# Altium PCB PCB_REMOTE CONTROL IR.PcbDoc
Units mil, origin at the board's own origin, x right, y up, seen from the top; angles counter-clockwise.
Board outline 2731.03 x 5071.03 mil, 2 copper layers (Top Layer, Bottom Layer); 48 components, 41 nets, 195 pads, 22 vias.
Unrouted connection lines stored in the file: 8.
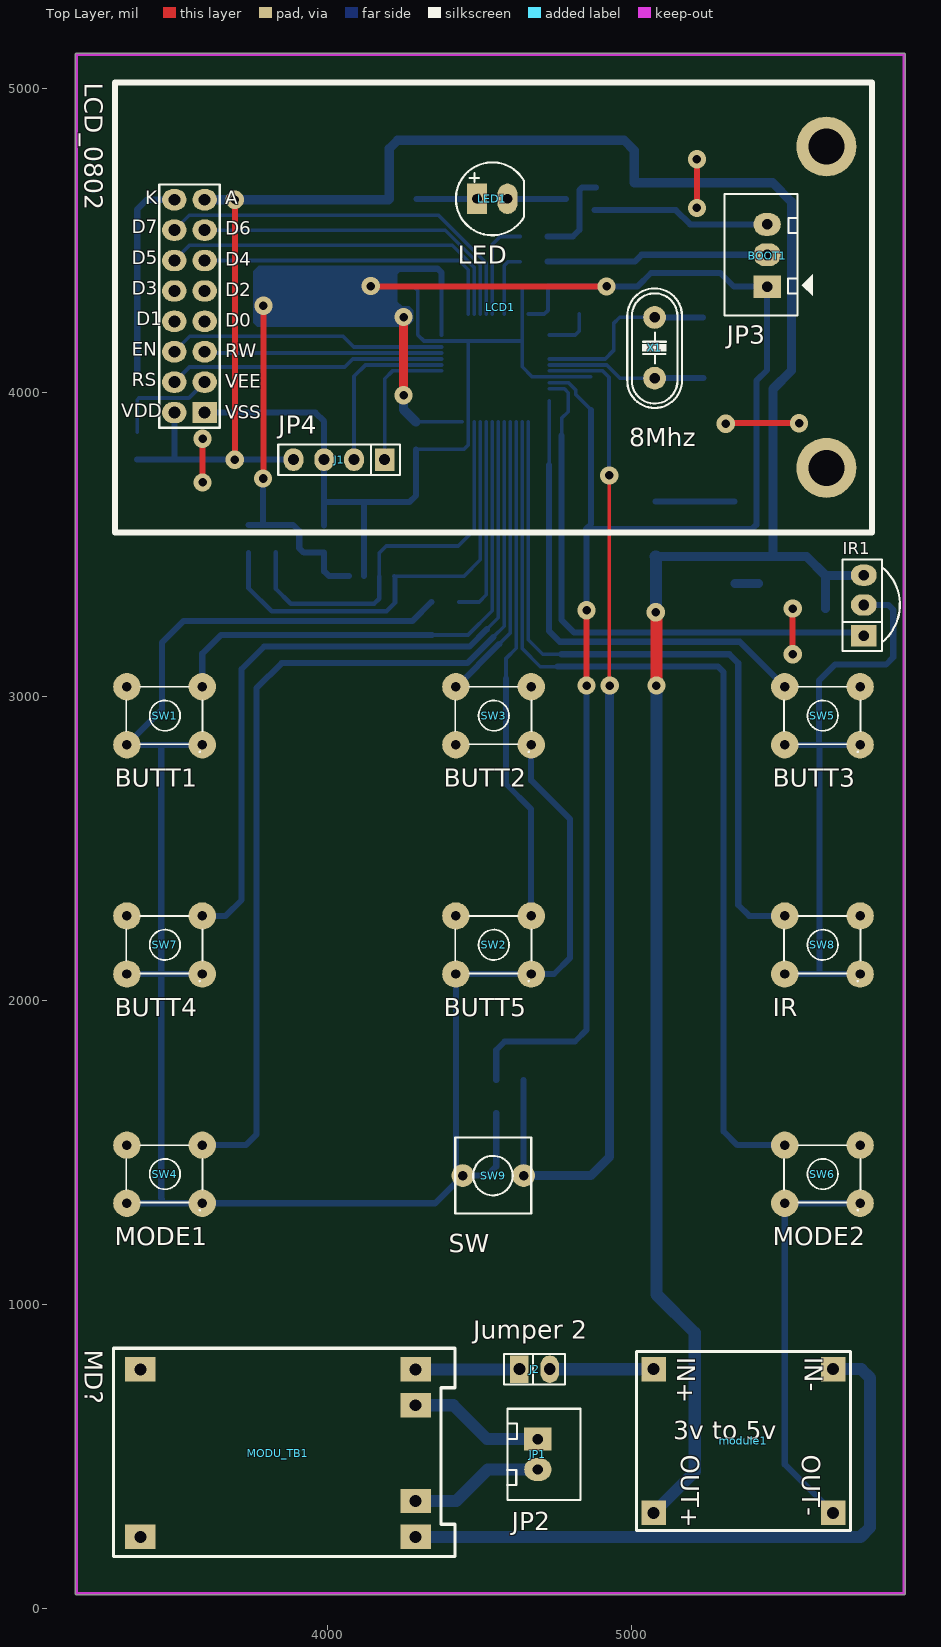
[diagram p0: Top Layer view]
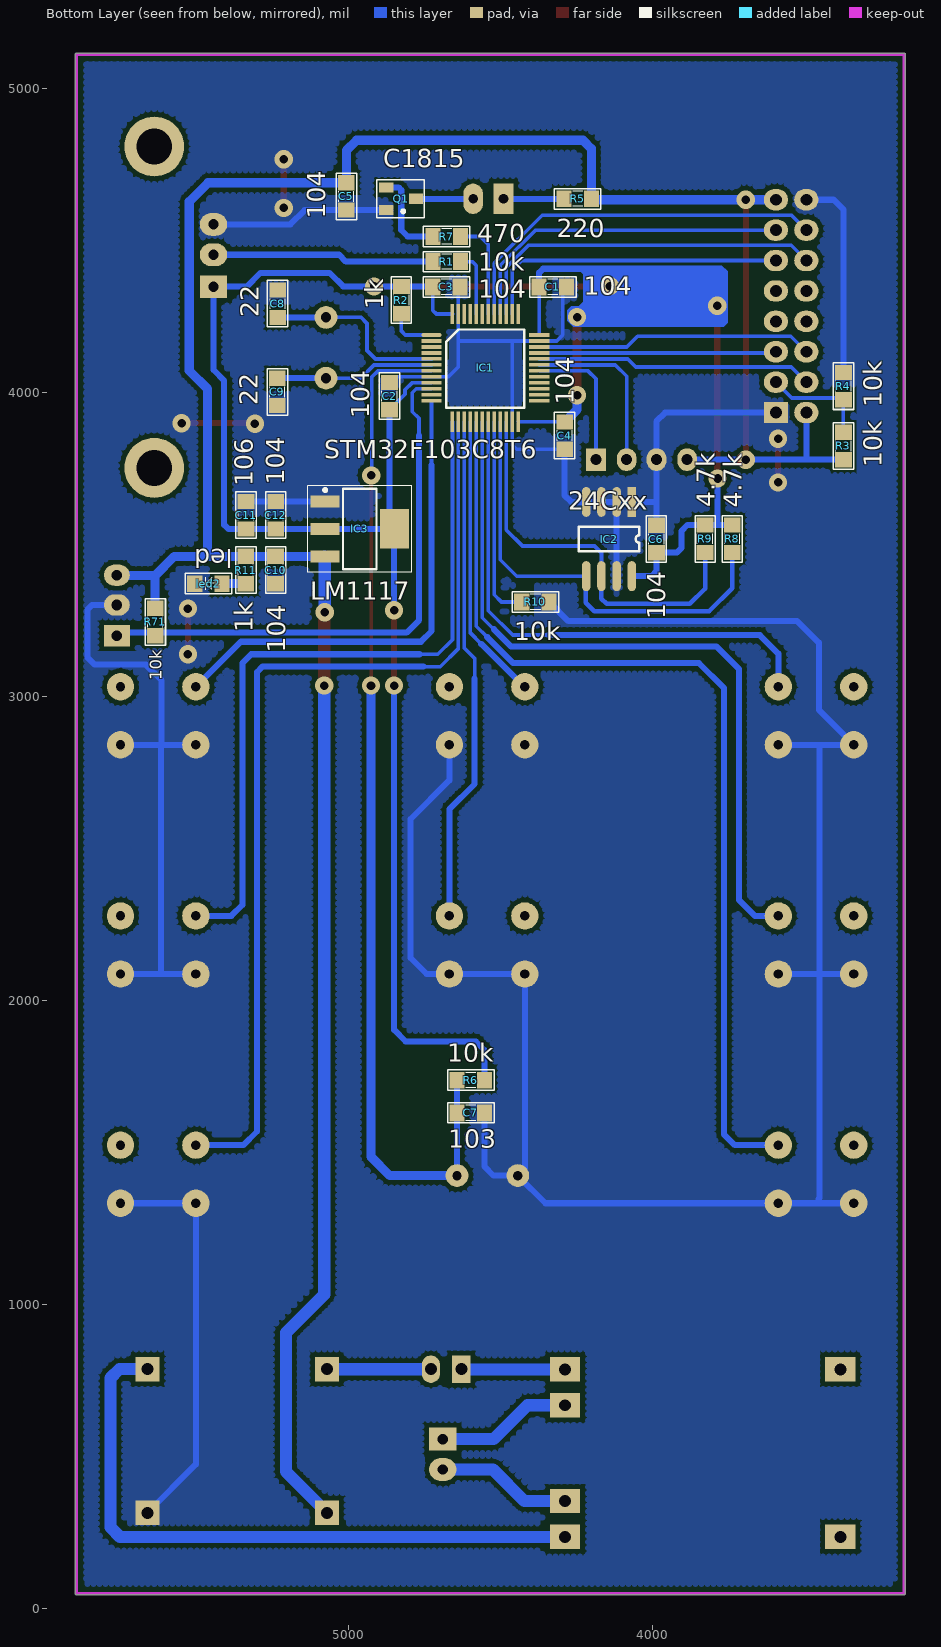
[diagram p1: Bottom Layer view, seen from below]
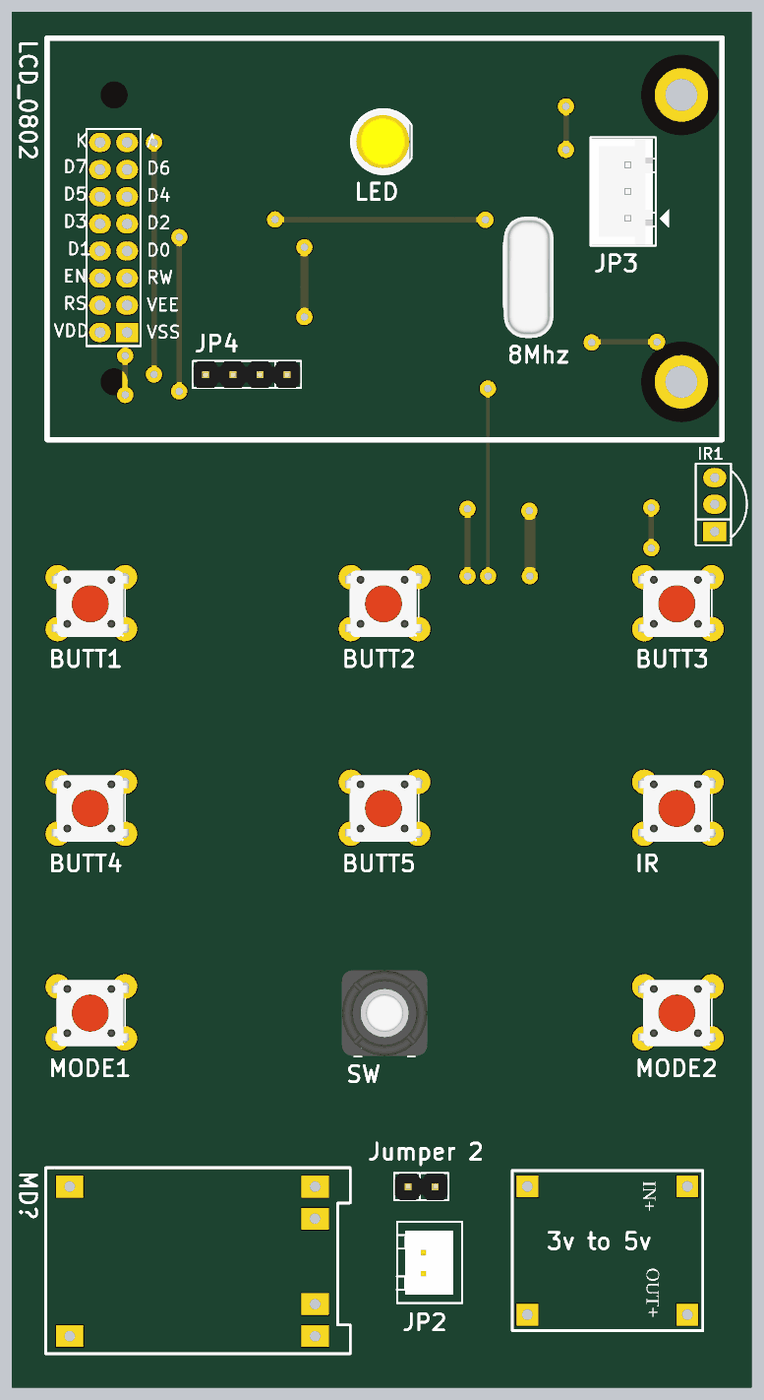
[diagram p2: 3D render of the assembled board from above, using the file's embedded part models]
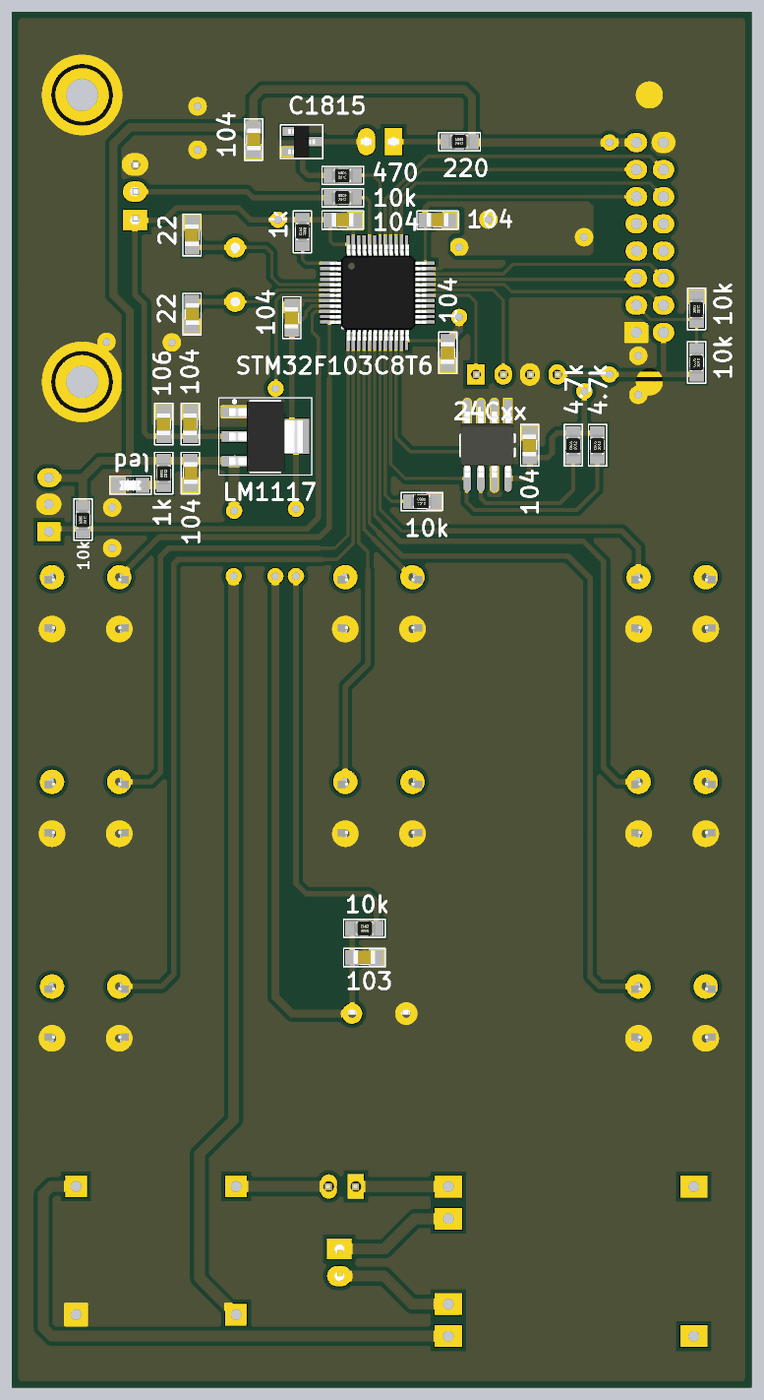
[diagram p3: 3D render of the assembled board from below, using the file's embedded part models]

## Layer stack, top to bottom
Top Layer: signal copper 1.4
Dielectric: dielectric 12.6, FR-4, Dk 4.8
Bottom Layer: signal copper 1.4

## Board outline
3168.99,51 3168.99,5110 cw(c3174,5110) 3169.09,5111 cw(c3174,5112) 3174,5117.02 5895,5117.02 cw(c5895,5112) 5900.02,5112 5900.02,51 cw(c5895,51) 5895,45.98 3174,45.98 cw(c3174,51)

## Design rules (kind name [scope] priority, off if disabled: settings)
Clearance POLY [Inpolygon] p1: gap=15
Clearance Width_IC1 [(ObjectKind = 'Track') And (Width = AsMils(11.99))] p2: gap=7
Clearance pad_IC1 [(ObjectKind = 'Pad') And (Component = 'IC1')] p3: gap=7
Clearance [All] p4: gap=10
ComponentClearance [All] p1: gap=0 collisioncheckmode=3 verticalgap=0 showdistances=FALSE
Height [All] p1: minheight=0 maxheight=10000 prefheight=500
PlaneConnect [All] p1: planeconnectstyle=Direct reliefexpansion=20 reliefentries=4 reliefconductorwidth=10 reliefairgap=10
PolygonConnect [All] p1: connectstyle=Direct reliefconductorwidth=10 reliefentries=4 polygonreliefangle="90 Angle"
RoutingVias [All] p1: holewidth=28 width=50 viastyle="Through Hole" minholewidth=28 minwidth=50 maxholewidth=28 maxwidth=500
SilkscreenOverComponentPads [All] p1: minsilkscreentomaskgap=10
SolderMaskExpansion [All] p1: expansion=4
Width [All] p1: maxlimit=100 minlimit=10 preferedwidth=10
24 further rules are at their usual default settings.

## Components (designator, comment, footprint, x,y, rotation, side; value= is the part's Value field where it differs from the comment)
BOOT1 "JP3" CON3 5445,4354 r90 top
C1 "104" SM-0805 4329,4348 r0 bottom
C2 "104" SM-0805 4866,3989 r270 bottom
C3 "104" SM-0805 4679,4348 r0 bottom
C4 "104" SM-0805 4290,3859 r270 bottom
C5 "104" SM-0805 5008,4646 r90 bottom
C6 "104" SM-0805 3988,3519 r270 bottom
C7 "103" SM-0805 4599,1631 r0 bottom
C8 "22" SM-0805 5234,4293 r270 bottom
C9 "22" SM-0805 5235,4003 r90 bottom
C10 "104" SM-0805 5241,3417 r90 bottom
C11 "106" SM-0805 5338,3597 r270 bottom
C12 "104" SM-0805 5240,3597 r270 bottom
IC1 "STM32F103C8T6" STM32F103C8T6 4781,4143 r180 bottom
IC2 "24Cxx" SOP8 4069,3641 r270 bottom
IC3 "LM1117" SOT223-4N 4964,3552 r180 bottom
IR1 "IR" IR 5763,3301 r90 top
J1 "JP4" jp4 4087,3780 r180 top
J2 "Jumper 2" JP2 4630,788 r0 top
JP1 "JP2" CON2 4691,558 r270 top
LCD1 "LCD_0802" LCD0802 3595,3930 r0 top
LED1 "LED" led5mm_yellow 4491,4638 r0 top
led2 "led" 0805 5461,3373 r0 bottom
MODU_TB1 "MD?" MODU_Tb4056 3836,512 r0 top
module1 "3v to 5v" "3v to 5v" 5367,552 r270 top
Q1 "C1815" SOT23B 4828,4638 r270 bottom
R1 "10k" RES_0805 4676,4427.5 r180 bottom
R2 "1k" RES_0805 4831,4303 r270 bottom
R3 "10k" RES_0805 3369,3827 r90 bottom
R4 "10k" RES_0805 3369,4024 r90 bottom
R5 "220" RES_0805 4245,4634 r180 bottom
R6 "10k" RES_0805 4601,1743 r0 bottom
R7 "470" RES_0805 4676,4510 r180 bottom
R8 "4.7k" RES_0805 3735,3522 r90 bottom
R9 "4.7k" RES_0805 3824,3522 r90 bottom
R10 "10k" RES_0805 4384,3308 r180 bottom
R11 "1k" RES_0805 5335,3419 r90 bottom
R71 "10k" RES_0805 5633,3248 r90 bottom
SW1 "BUTT1" SW4 3463,2937 r0 top
SW2 "BUTT5" SW4 4545,2183 r0 top
SW3 "BUTT2" SW4 4545,2937 r0 top
SW4 "MODE1" SW4 3463,1429 r0 top
SW5 "BUTT3" SW4 5627,2937 r0 top
SW6 "MODE2" SW4 5627,1429 r0 top
SW7 "BUTT4" SW4 3463,2183 r0 top
SW8 "IR" SW4 5627,2183 r0 top
SW9 "SW" SW2 4443.99,1425 r0 top
X1 "8Mhz" XT2 5075,4148 r90 top

## Footprints (in the part's own frame and the unit in brackets; to place one, negate y for a bottom-side part, rotate by r counter-clockwise, add the part's x,y. Pads: shape width x height; smd on the part's side, far side on the other; paste and mask are expansions set on the pad)
"3v to 5v" [mm]
  rect 2.032x2.032 hole 1: 1(-6,7.5) 2(-6,-7.5) 3(6,-7.5) 4(6,7.5)
  silkscreen extent -7.49,-8.92 7.49,8.94
0805 [mil]
  rect 50x55 smd: 1(-44,1) 2(46,1)
  silkscreen extent -76,-33 77,34, body extent -39,-16 42,20, height 33
CON2 [mil] "CON2"
  rect 75x90 hole 34: 1(0,0)
  oval 75x90 hole 34: 2(100,0)
  silkscreen extent -100,-101 200,140, body extent -68,-70 168,107, height 236
CON3 [mil] "CON 3"
  rect 75x90 hole 34: 1(-5,0)
  oval 75x90 hole 34: 2(100,0) 3(200,0)
  silkscreen extent -100,-150 300,140, body extent -95,-90 295,136, height 276
IR [mil] "Receiver Infared IC"
  rect 70x85 hole 35: 1(-100,0)
  oval 70x85 hole 35: 2(1,0) 3(99,0)
  silkscreen extent -150,-119 150,70
JP2 [mil]
  rect 60x90 hole 39.37: 1(0,0)
  oval 60x90 hole 39.37: 2(100,0)
  silkscreen extent -50,-50 150,50, body extent -48,-50 148,48, height 323
jp4 [mil] "Jumper 4"
  rect 65x75 hole 36: 1(-100,0)
  oval 65x75 hole 36: 2(1,0) 3(99,0) 4(200,0)
  silkscreen extent -150,-50 250,50, body extent -148,-48 248,50, height 323
LCD0802 [mil]
  rect 80x70 hole 39.37: 1(0,5)
  oval 80x70 hole 39.37: 2(-100,5) 3(0,105) 4(-100,105) 5(0,205) 6(-100,205) 7(0,305) 8(-100,305) 9(0,405) 10(-100,405) 11(0,505) 12(-100,505) 13(0,605) 14(-100,605) 15(0,705) 16(-100,705)
  round 0 all layers, no hole mask+50: ""(-47.91,-177.09) ""(-47.91,880)
  round 196.85 hole 118.11 mask+50: ""(2045,-177.09) ""(2045,880)
  silkscreen extent -295,-390 2195,1090
led5mm_yellow [mil]
  rect 65x100 hole 32: 1(0,0)
  oval 65x100 hole 32: 2(100,0)
  silkscreen extent -70,-120 154,120, body extent -67,-118 146,119, height 347
MODU_Tb4056 [mm]
  rect 2.54x2.032 hole 1: 1(-11.5,7) 2(-11.5,-7) 3(11.5,-7) 4(11.5,-4) 5(11.5,4) 6(11.5,7)
  silkscreen extent -13.74,-8.64 14.78,8.76
RES_0805 [mil]
  rect 50x55 smd: 1(-47,4) 2(43,4)
  silkscreen extent -79,-30 74,37, body extent -43,-21 35,29, height 18
SM-0805 [mil] "Compoment SMD 80x50mil"
  rect 50x55 smd: 1(-45,0) 2(45,0)
  silkscreen extent -77,-34 76,33, body extent -40,-27 40,23, height 24
SOP8 [mm]
  rect 2.5x0.7 smd: 1(0,0)
  oval 2.5x0.7 smd: 2(0,-1.27) 3(0,-2.54) 4(0,-3.81) 5(6.2,-3.81) 6(6.2,-2.54) 7(6.2,-1.27) 8(6.2,0)
  silkscreen extent 2.08,-4.45 4.12,0.63, body extent -0.08,-4.44 6.12,0.56, height 1.74
SOT23B [mm] "SOT 23B"
  rect 0.85x1.2 smd: 1(0.94,-1.245) 2(0,1.25) 3(-0.95,-1.25)
  silkscreen extent -1.57,-2.03 1.57,1.93, body extent -1.5,-1.3 1.5,1.2, height 1.06
SOT223-4N [mm] "SOT223, 4-Leads, Body 6.5x3.5mm, Pitch 2.3mm, Lead Span 7mm, IPC Medium Density"
  rect 2.4x1 smd: 1(-2.9,2.3) 2(-2.9,0) 3(-2.9,-2.3)
  rect 2.4x3.3 smd: 4(2.9,0)
  silkscreen extent -4.35,-3.6 4.35,3.6, body extent -3.39,-3.27 3.5,3.23, height 1.72
STM32F103C8T6 [mm]
  oval 1.7x0.3 smd: 1(1.346,1.194)
  rect 1.7x0.3 smd: 2(1.346,0.694) 3(1.346,0.194) 4(1.346,-0.306) 5(1.346,-0.806) 6(1.346,-1.306) 7(1.346,-1.806) 8(1.346,-2.306) 9(1.346,-2.806) 10(1.346,-3.306) 11(1.346,-3.806) 12(1.346,-4.306) 25(10.346,-4.306) 26(10.346,-3.806) 27(10.346,-3.306) 28(10.346,-2.806) 29(10.346,-2.306) 30(10.346,-1.806) 31(10.346,-1.306) 32(10.346,-0.806) 33(10.346,-0.306) 34(10.346,0.194) 35(10.346,0.694) 36(10.346,1.194)
  rect 0.3x1.7 smd: 13(3.096,-6.056) 14(3.596,-6.056) 15(4.096,-6.056) 16(4.596,-6.056) 17(5.096,-6.056) 18(5.596,-6.056) 19(6.096,-6.056) 20(6.596,-6.056) 21(7.096,-6.056) 22(7.596,-6.056) 23(8.096,-6.056) 24(8.596,-6.056) 37(8.596,2.944) 38(8.096,2.944) 39(7.596,2.944) 40(7.096,2.944) 41(6.596,2.944) 42(6.096,2.944) 43(5.596,2.944) 44(5.096,2.944) 45(4.596,2.944) 46(4.096,2.944) 47(3.596,2.944) 48(3.096,2.944)
  silkscreen extent 2.57,-4.88 9.09,1.65, body extent 1.42,-6.07 10.42,2.93, height 1.5
SW2 [mil] "SW button 2pin, 250x 250 mil"
  round 75 hole 31: 1(0,0) 2(200,0)
  silkscreen extent -25,-125 225,125, body extent -56,-161 258,159, height 157
SW4 [mil] "SW button 4pin, 250 x250 mil"
  round 90 hole 31: 1(-124,-95) 2(124,96) 3(124,-95) 4(-124,96)
  silkscreen extent -126,-119 125,96, body extent -160,-124 152,120, height 276
XT2 [mil] "Footpin for Crystal 2 pin"
  round 75 hole 34: 1(-100,0) 2(100,0)
  silkscreen extent -198,-90 195,90, body extent -233,-93 213,90, height 138

## Part data
BOOT1: library part Con3, "Connector 3"
C1 C2 C3 C4 C5 C6 C7 C8 C9 C10 C11 C12: library part CM, "Cap SMD"
IC2: "Standard 2-Wire Bus Interface Serial EEPROM"
IC3: "3v3"
IR1: "Receiver Infraed IC"
J2: library part "JP 2"
JP1: library part Con2, "Connector 2"
LED1: "LED Single colour Green and Red"
led2: library part led_dan
MODU_TB1: library part TB4056, "Modu_nguon"
module1: library part "3V TO 5V"
Q1: "NPN 600mW, ECB"
R1 R2 R3 R4 R5 R6 R7 R8 R9 R10 R11 R71: library part RES_0805, "res_dan"
SW1 SW2 SW3 SW4 SW5 SW6 SW7 SW8: library part SW4, "Switch button 4 pin"
SW9: library part SW2, "Switch button 2 pin"
X1: library part XT2, "Crystal For all Crystal 2pin."

## Via types
v1: diameter 60, hole 28, Top Layer to Bottom Layer, 22 vias

## Nets (pads, with @x,y where several pads share a name; then routed paths per layer and width w, separated by ;. In a path a pad name is that pad's centre, name@x,y a point inside that pad or via, vN(x,y) a via of type N, cw(c..) or ccw(c..) an arc to the next point about the centre after c; other vN are vias at no path point)
3.3: BOOT1.1 C1.2 C2.2 C3.2 C4.1 C6.2 C11.2 C12.2 IC1.9 IC1.24 IC1.36 IC1.48 IC2.8 IC3.2 IC3.4 R2.1 R6.1 R8.2 R9.2 | length 8443.9
  Top Layer w20: v1(3787,3718) 3788,3719 v1(3788,4286) ; v1(4141,4351) 4142,4350 v1(4917,4350) ; v1(4851,3037) v1(4851,3285)
  Top Layer w30: v1(4249,3992) v1(4249,4249)
  Bottom Layer w11.99: C4.1 4290.57,3904.57 IC1.24 ; IC1.36 4374,4190.33 C1.2 ; IC1.48 4711.9,4258.9 4724,4271 C3.2 ; IC1.9 4792.48,4032.52 4815,4010 4815,3995 C2.2
  Bottom Layer w20: R8.2 3783.5,3565 ; v1(3787,3718) 3787,3568.5 3783.5,3565 ; v1(3788,4286) 3787.5,4286.5 4211.5,4286.5 ; IC2.8 4004.09,3396.91 3988,3413 C6.2 3921,3474 3906,3489 3906,3545 3886,3565 R9.2 3783.5,3565 ; v1(4141,4351) 4203,4351 4206,4348 ; v1(4249,4249) 4211.5,4286.5 ; C1.2 4374,4395 4361,4408 4219,4408 4206,4395 4206,4348 ; R6.1 4554,1838 4582,1866 4813,1866 4851,1904 v1(4851,3037) ; C3.2 4726,4350 R2.1 v1(4917,4350) 5019,4350 5063,4394 5291,4394 5336,4349 BOOT1.1 5445,4075 5410,4040 5410,3566 5396,3552 C11.2 C12.2 IC3.2 IC3.4 ; v1(4851,3285) 4851,3550.83 IC3.4 ; C2.2 4866,3568.17 IC3.4 ; 4206,4348 4206,4292 4211.5,4286.5
  Bottom Layer w30: v1(4249,3992) 4249,3945 C4.1
5V: C5.2 C10.2 IC3.3 IR1.3 J1.4 LCD1.2 LCD1.15 module1.3 R3.1 R5.2 R11.2 R71.2 | length 9044.2
  Top Layer w20: v1(3694,3780) v1@3694,4634
  Top Layer w40: v1(5079,3278) 5081,3276 v1(5081,3037)
  Bottom Layer w20: R3.1 3497,3780 ; LCD1.2 3495,3782 3497,3780 ; J1.4 v1(3694,3780) 3497,3780 ; R11.2@5338.45,3461.45 R11.2
  Bottom Layer w30: LCD1.15 v1(3694,4635) 4199,4635 R5.2 4202,4803 4229.5,4830.5 4974.5,4830.5 5008,4797 C5.2 5463,4691 5525,4629 5525,4073 5464.5,4012.5 5464.5,3462 ; IC3.3 5078.72,3462 C10.2 5337.9,3462 R11.2@5338.45,3461.45 ; R11.2 5464.5,3462 ; R71.2 5637,3399 ; IR1.3 5762,3399 5637,3399 ; 5464.5,3462 5574,3462 5637,3399
  Bottom Layer w40: module1.3 5207,451.06 5207,908 5081,1034 v1(5081,3037) ; IC3.3 5079,3460.62 v1(5079,3278)
BOOT0: BOOT1.2 R1.1 | length 731.3
  Bottom Layer w20: R1.1 5009.5,4431.5 5032,4454 BOOT1.2
BOOT1: IC1.20 R10.1 | length 669.2
  Bottom Layer w11.99: R10.1 4498,3312 4521.31,3335.31 IC1.20
BUTT_1: IC1.19 SW1.2 SW1.4 | length 1743
  Bottom Layer w11.99: 4343,3203 4461,3203 4540.99,3282.99 IC1.19
  Bottom Layer w20: SW1.2 3587,3142 3648,3203 4343,3203
BUTT_2: IC1.16 SW3.2 SW3.4 | length 947.2
  Bottom Layer w11.99: 4564.21,3173.79 4600.05,3209.62 IC1.16
  Bottom Layer w20: SW3.4 4423.43,3033 4564.21,3173.79
BUTT_3: IC1.12 SW5.2 SW5.4 | length 1608.3
  Bottom Layer w11.99: 4728,3762 IC1.12
  Bottom Layer w20: 4728,3762 4728,3216 4763,3181 5355,3181 SW5.4
BUTT_4: IC1.18 SW7.2 SW7.4 | length 2470
  Bottom Layer w11.99: 4523,3222 4560.68,3259.68 IC1.18
  Bottom Layer w20: SW7.2 3664,2279 3716,2331 3716,3091 3790,3165 4466,3165 4523,3222
BUTT_5: IC1.15 SW2.2 SW2.4 | length 1673.9
  Bottom Layer w11.99: 4586,3060 4586,3126 4619.73,3159.73 IC1.15
  Bottom Layer w20: 4586,3060 4586,2713 4669,2630 SW2.2
CL: IC1.22 IC2.6 R9.1 | length 1337.8
  Bottom Layer w11.99: IC2.6 4169,3473 4192,3496 4429,3496 4481.94,3548.94 IC1.22
  Bottom Layer w15: R9.1 3828,3356 3878,3306 4152,3306 4169,3323 IC2.6
D4: IC1.38 LCD1.11 | length 1025.8
  Bottom Layer w11.99: LCD1.11 4432.29,4435 4462.25,4405.04 IC1.38
D5: IC1.39 LCD1.12 | length 1191.1
  Bottom Layer w11.99: LCD1.12 3545,4485 4409.14,4485 4481.94,4412.21 IC1.39
D6: IC1.40 LCD1.13 | length 1115
  Bottom Layer w11.99: LCD1.13 4386,4535 4501.62,4419.38 IC1.40
D7: IC1.41 LCD1.14 | length 1279.5
  Bottom Layer w11.99: LCD1.14 3544,4584 4363.86,4584 4521.31,4426.55 IC1.41
DA: IC1.21 IC2.5 R8.1 | length 1490.6
  Bottom Layer w11.99: IC2.5 4447.91,3396.91 4501.62,3450.62 IC1.21
  Bottom Layer w15: R8.1 3739,3357 3815,3281 4193,3281 4221,3309 4221,3394.91 IC2.5
EN: IC1.34 LCD1.6 | length 914.4
  Bottom Layer w11.99: LCD1.6 3546,4186 4050,4186 4085.37,4150.63 IC1.34
GND: BOOT1.3 C1.1 C2.1 C3.1 C4.2 C5.1 C6.1 C7.1 C8.1 C9.1 C10.1 C11.1 C12.1 IC1.8 IC1.23 IC1.35 IC1.47 IC2.1 IC2.2 IC2.3 IC2.4 IC2.7 IC3.1 IR1.2 J1.3 LCD1.1 LCD1.16 led2.2 module1.4 Q1.1 R4.2 R10.2 SW1.1 SW1.3 SW2.1 SW2.3 SW3.1 SW3.3 SW4.1 SW4.3 SW5.1 SW5.3 SW6.1 SW6.3 SW7.1 SW7.3 SW8.1 SW8.3 SW9.1 | length 15163.1
  Top Layer w20: v1(3588,3705) v1(3588,3849) ; v1(5214,4608) v1(5214,4768) ; v1(5309,3898) 5311,3900 v1(5550,3900) ; v1(5529,3290) v1(5529,3140) ; v1(5529,3140) 5530,3139 5530,3129 5529,3130 v1(5529,3140)
  Bottom Layer w11.99: C1.1 4296,4336 4296,4190.31 4316,4170.31 IC1.35 4461,4170.31 ; C4.2 4448,3814 4462.25,3828.25 IC1.23 4462.25,4169.06 4461,4170.31 ; C3.1 4639.42,4342.58 IC1.47 4639.42,4172 ; C2.1@4864.2,4052.2 IC1.8 4672.8,4052.2 4639.42,4085.58 4639.42,4172 ; 4461,4170.31 4637.73,4170.31 4639.42,4172
  Bottom Layer w20: SW4.1 SW4.3 4352.99,1334 SW9.1 ; SW7.1 3452,2088 ; R4.2 3373,4603 3405,4635 LCD1.16 ; 3455,1348 3452,1351 3452,2088 ; v1@3585,3849 v1(3588,3849) ; SW7.3 3452,2088 ; SW1.3 3452,2842 ; LCD1.1 3959,3935 3988,3906 J1.3 3988,3641 ; C6.1 3988,3641 ; IC2.7 IC2.2 ; C4.2 4290,3662 4269,3641 IC2.4 IC2.3 IC2.2 ; R10.2 4277.99,3248.99 3524.99,3248.99 3454,3178 3454,2957 SW1.1 3452,2842 ; C7.1 4554,1455 4524,1425 SW9.1 ; SW3.3 4669,2725 4797,2597 4797,2141 4744,2088 SW2.3 SW2.1 4421,1447.99 SW9.1 ; Q1.1 C5.1 5145,4601 5192,4554 BOOT1.3 ; IC3.1 5337.45,3642.55 C11.1 ; v1(5214,4608) v1@5220,4608 ; v1(5309,3898) v1@5310,3898 ; SW8.1 5618,2088 ; SW5.1 5618,2842 ; SW6.1@5505,1336 SW6.1 ; v1(5529,3290) 5531,3292 v1@5535,3292 ; module1.4 5503,475.06 SW6.1 ; SW6.3 SW6.1 ; SW8.3 5618,2088 ; SW5.3 5618,2842 ; IR1.2 5844,3302 5860,3286 5860,3130 5836,3106 5668,3106 5616,3054 5616,2844 5618,2842 ; 3452,2088 3452,2842 ; 3988,3641 IC2.1 IC2.2 ; 5618,2088 5618,2842
IN_IR: IC1.10 IR1.1 R71.1 | length 1840.6
  Bottom Layer w11.99: IC1.10 4778.16,4012.84 4791,4000 4791,3938 4769,3916 4769,3860
  Bottom Layer w20: 4769,3860 4769,3252 4810,3211 5753,3211 IR1.1
IR: IC1.13 SW8.2 SW8.4 | length 2403.3
  Bottom Layer w11.99: IC1.13 4659.1,3187.9 4707,3140 4768,3140
  Bottom Layer w20: 4768,3140 5321,3140 5350,3111 5350,2315 5386,2279 SW8.4
MODE_1: IC1.17 SW4.2 SW4.4 | length 3232.7
  Bottom Layer w11.99: 4544.5,3196.5 4580.36,3232.36 IC1.17
  Bottom Layer w20: SW4.2 3730,1525 3766,1561 3766,3029 3848,3111 4459,3111 4544.5,3196.5
MODE_2: IC1.14 SW6.2 SW6.4 | length 3171.3
  Bottom Layer w11.99: IC1.14 4639.42,3158.58 4699,3099 4755,3099
  Bottom Layer w20: 4755,3099 5284,3099 5302,3081 5302,1570 5347,1525 SW6.4
NetIC1_1: IC1.1 R2.2 | length 161.4
  Bottom Layer w11.99: IC1.1 4814,4190 4827,4203 R2.2
NetIC1_44: IC1.44 R1.2 | length 217.5
  Bottom Layer w11.99: IC1.44 4580.36,4418.36 4593.5,4431.5 R1.2
NetJ2_1: J2.1 MODU_TB1.6 | length 341.4
  Bottom Layer w40: MODU_TB1.6 4629.59,787.59 J2.1
NetJ2_2: J2.2 module1.2 | length 341.8
  Bottom Layer w40: J2.2 5071.5,788 module1.2
NetJP1_1: JP1.1 MODU_TB1.5 | length 448.4
  Bottom Layer w40: MODU_TB1.5 4412.52,669.48 4524,558 JP1.1
NetJP1_2: JP1.2 MODU_TB1.4 | length 445.1
  Bottom Layer w40: MODU_TB1.4 4422.52,354.52 4526,458 JP1.2
NetLCD1_3: LCD1.3 R3.2 R4.1 | length 353
  Bottom Layer w11.99: R3.2 R4.1 3378.99,3982.99 3542.99,3982.99 LCD1.3
NetLED1_1: LED1.1 R5.1 | length 199
  Bottom Layer w20: R5.1 LED1.1
NetLED1_2: LED1.2 Q1.2 | length 192.8
  Bottom Layer w20: LED1.2 Q1.2@4783.79,4638
Netled2_1: led2.1 R11.1 | length 78
  Bottom Layer w30: R11.1 led2.1
NetMODU_TB1_3: MODU_TB1.3 module1.1 | length 2133.2
  Bottom Layer w40: MODU_TB1.3 5752.41,236.41 5784,268 5784,759 5754.78,788.22 module1.1
NetQ1_3: Q1.3 R7.1 | length 302.8
  Bottom Layer w20: R7.1 4806,4514 4827.41,4535.41 4827.41,4666.41 4836.4,4675.4 Q1.3 Q1.3@4882.21,4675.4
NRST: C7.2 IC1.7 R6.2 SW9.2 | length 3393.3
  Top Layer w11.99: v1(4926,3728) 4926,3038 v1(4927,3037)
  Bottom Layer w11.99: IC1.7 4728.1,4071.99 4904.01,4071.99 4925,4051 4925,3729 v1(4926,3728)
  Bottom Layer w20: SW9.2 R6.2
  Bottom Layer w30: SW9.2 4865,1425 4927,1487 v1(4927,3037)
OSC_IN: C8.2 IC1.5 X1.2 | length 614.8
  Bottom Layer w11.99: IC1.5 4912.26,4111.26 4940,4139 4940,4228 4960,4248 X1.2
  Bottom Layer w20: X1.2 C8.2
OSC_OUT: C9.2 IC1.6 X1.1 | length 525
  Bottom Layer w11.99: IC1.6 4917.43,4091.57 4961,4048 X1.1
  Bottom Layer w20: X1.1 C9.2
OUT_IR: IC1.42 R7.2 | length 331.9
  Bottom Layer w11.99: IC1.42 4540.99,4409.99 4540.99,4487.99 4567,4514 R7.2
RS: IC1.32 LCD1.4 | length 910.3
  Bottom Layer w11.99: LCD1.4 3545,4085 4056,4085 4082.26,4111.26 IC1.32
RW: IC1.33 LCD1.5 | length 780.3
  Bottom Layer w11.99: LCD1.5 3599.05,4130.94 IC1.33
RX: IC1.30 J1.1 | length 463.4
  Bottom Layer w11.99: J1.1 4187,4046 4212.89,4071.89 IC1.30
TX: IC1.31 J1.2 | length 577.2
  Bottom Layer w11.99: J1.2 4086,4054 4123.57,4091.57 IC1.31
pads on no net: IC1.2 IC1.3 IC1.4 IC1.11 IC1.25 IC1.26 IC1.27 IC1.28 IC1.29 IC1.37 IC1.43 IC1.45 IC1.46 LCD1. LCD1.7 LCD1.8 LCD1.9 LCD1.10 MODU_TB1.1 MODU_TB1.2

## Polygon pours and split planes (outlines as drawn)
GND on Bottom Layer "Bottom Layer-No Net 1" (hatched 90Degree grid 20 track 20, remove dead copper, pour order 2): 3174,5110 3176,5112 5895,5112 5895,51 3174,51

## Keep-outs
Keep-Out Layer:
  lines w10: 3174,5110 3174,51 5895,51 5895,5112 3174,5112

## Other copper
Bottom Layer:
  region net 3.3: 4238,4418 3773,4418 3754,4399 3754,4231 3767,4218 4262,4218 4281,4237 4281,4271 4268,4284 4244,4284 4229,4299 4229,4390 4238,4399

## Text inside footprints (layer, text, board x,y; h text height)
LCD1: Top Overlay "VSS" at 3663.06,3915 h45; Top Overlay "VDD" at 3320,3920 h45; Top Overlay "VEE" at 3663.06,4015.71 h45; Top Overlay "D0" at 3663.06,4217.14 h45; Top Overlay "D1" at 3370,4222.14 h45; Top Overlay "D2" at 3663.06,4317.86 h45; Top Overlay "D3" at 3355,4322.86 h45; Top Overlay "D4" at 3663.06,4418.57 h45; Top Overlay "D5" at 3355,4423.57 h45; Top Overlay "D6" at 3663.06,4519.29 h45; Top Overlay "D7" at 3355,4524.29 h45; Top Overlay "RS" at 3355,4020.71 h45; Top Overlay "RW" at 3663.06,4116.43 h45; Top Overlay "EN" at 3355,4121.43 h45; Top Overlay "A" at 3663.06,4620 h45; Top Overlay "K" at 3399.99,4620 h45
module1: Top Overlay "OUT-" at 5541,506 h100 r270; Top Overlay "OUT+" at 5142,506 h100 r270; Top Overlay "IN+" at 5129,827 h100 r270; Top Overlay "IN-" at 5549,827 h100 r270